# Altium PCB PCB1.PcbDoc
Units mm, origin at the board's own origin, x right, y up, seen from the top; angles counter-clockwise.
Board outline 35.31 x 39.12 mm, 4 copper layers (Top Layer, Layer 1, Layer 2, Bottom Layer), stack 0.603 mm thick; 78 components, 57 nets, 253 pads, 103 vias.
Unrouted connection lines stored in the file: 26.
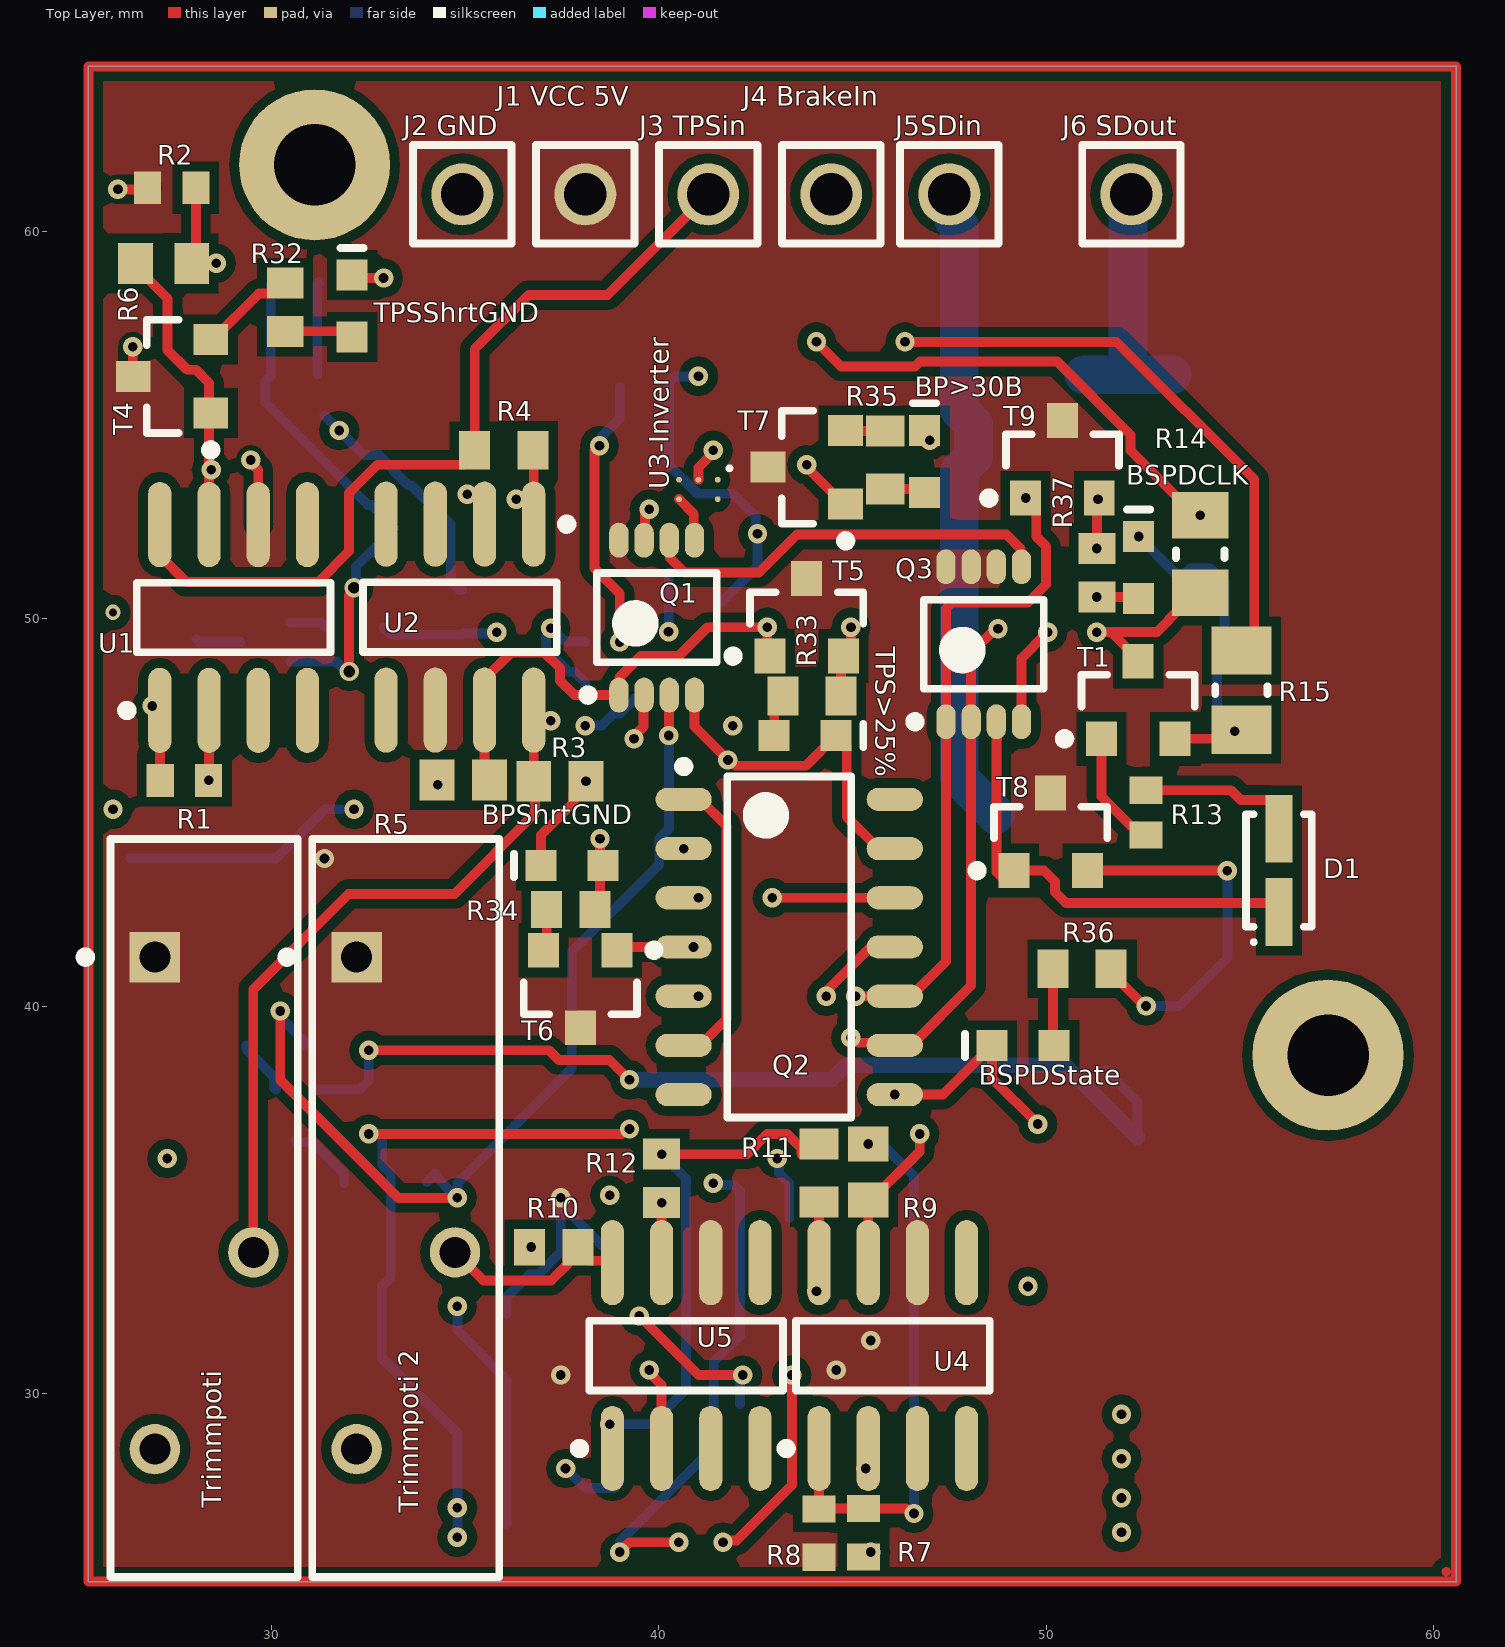
[diagram p0: Top Layer view]
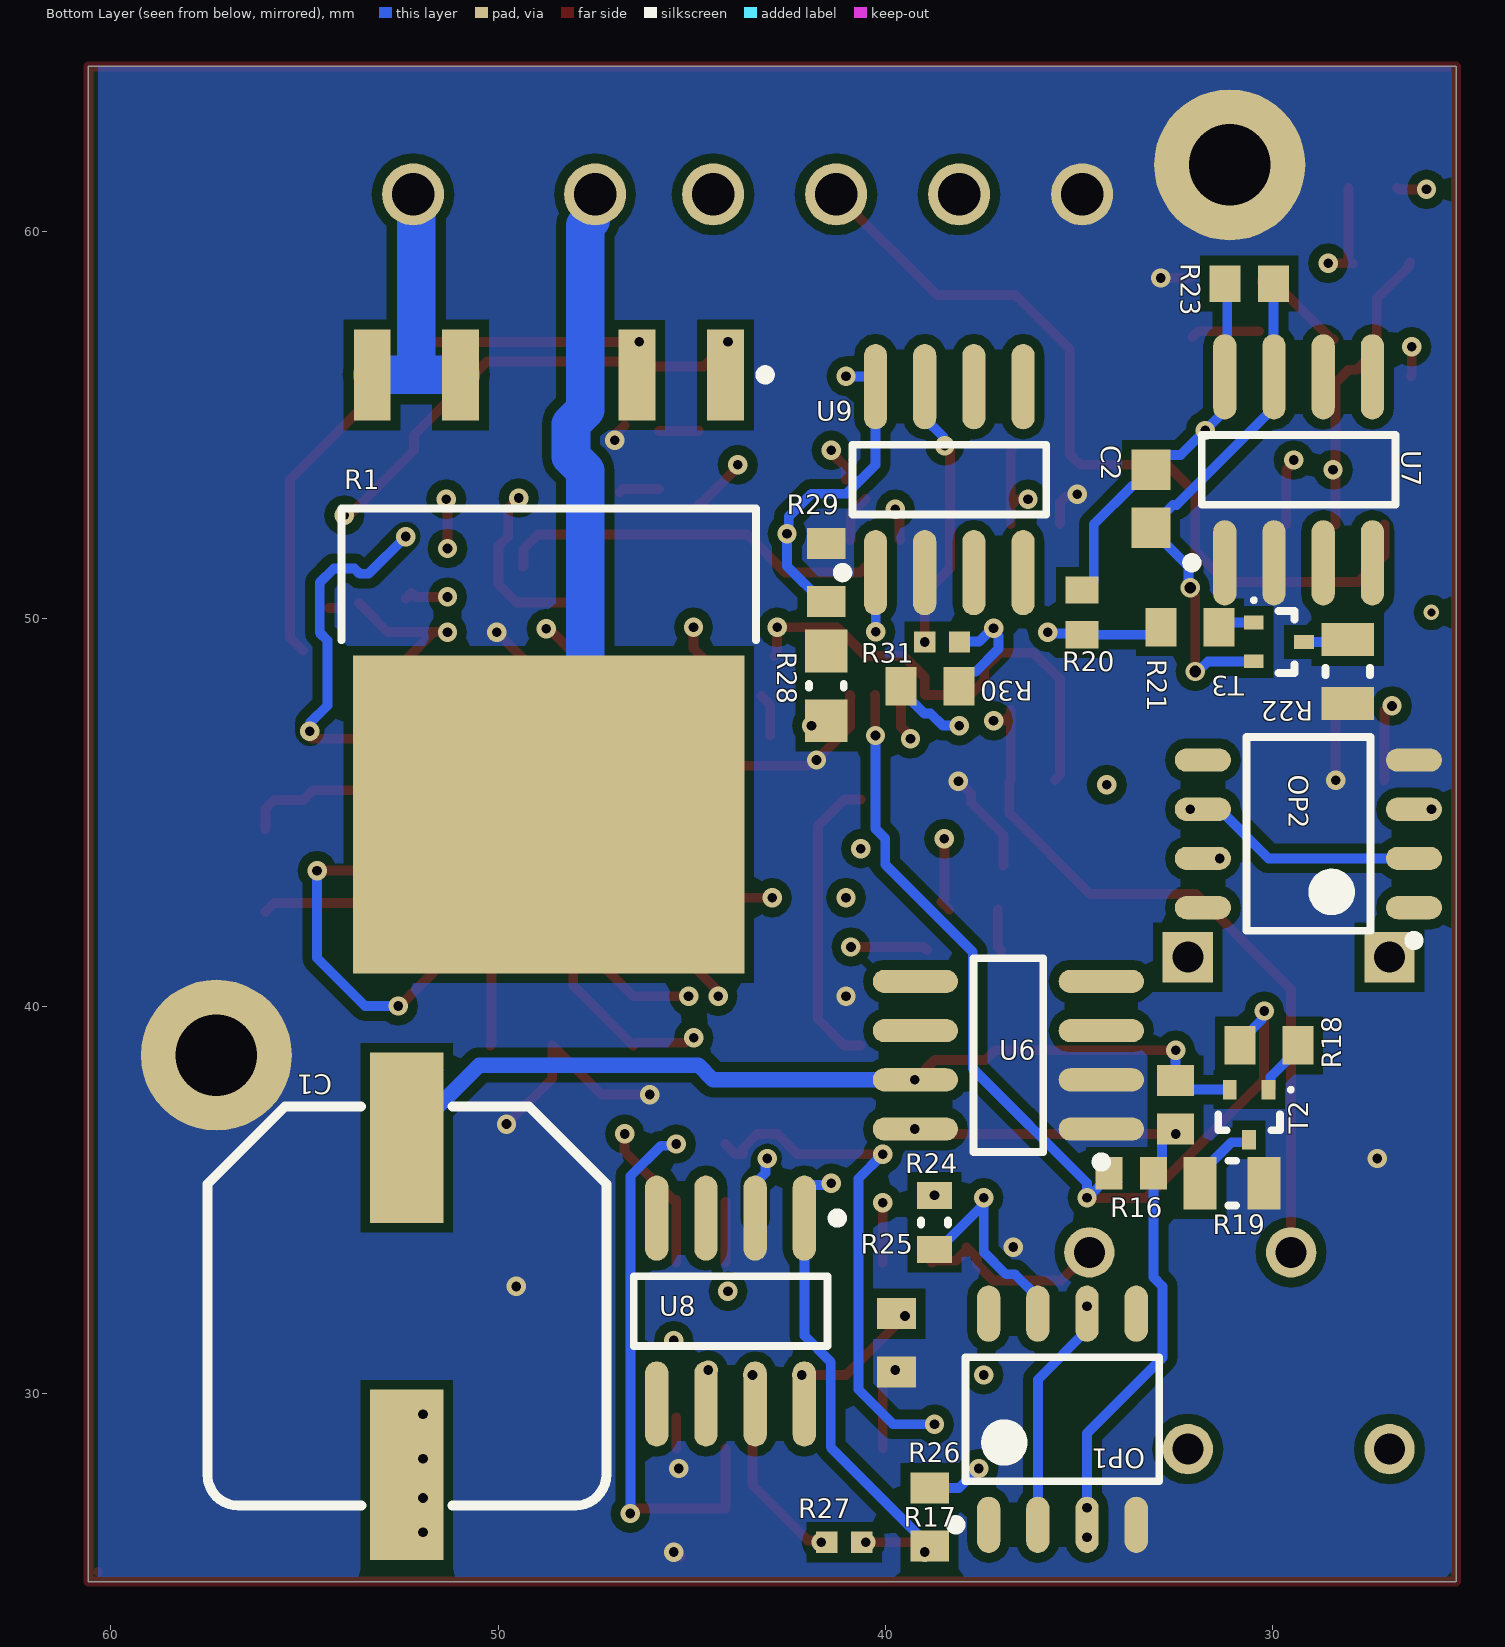
[diagram p1: Bottom Layer view, seen from below]
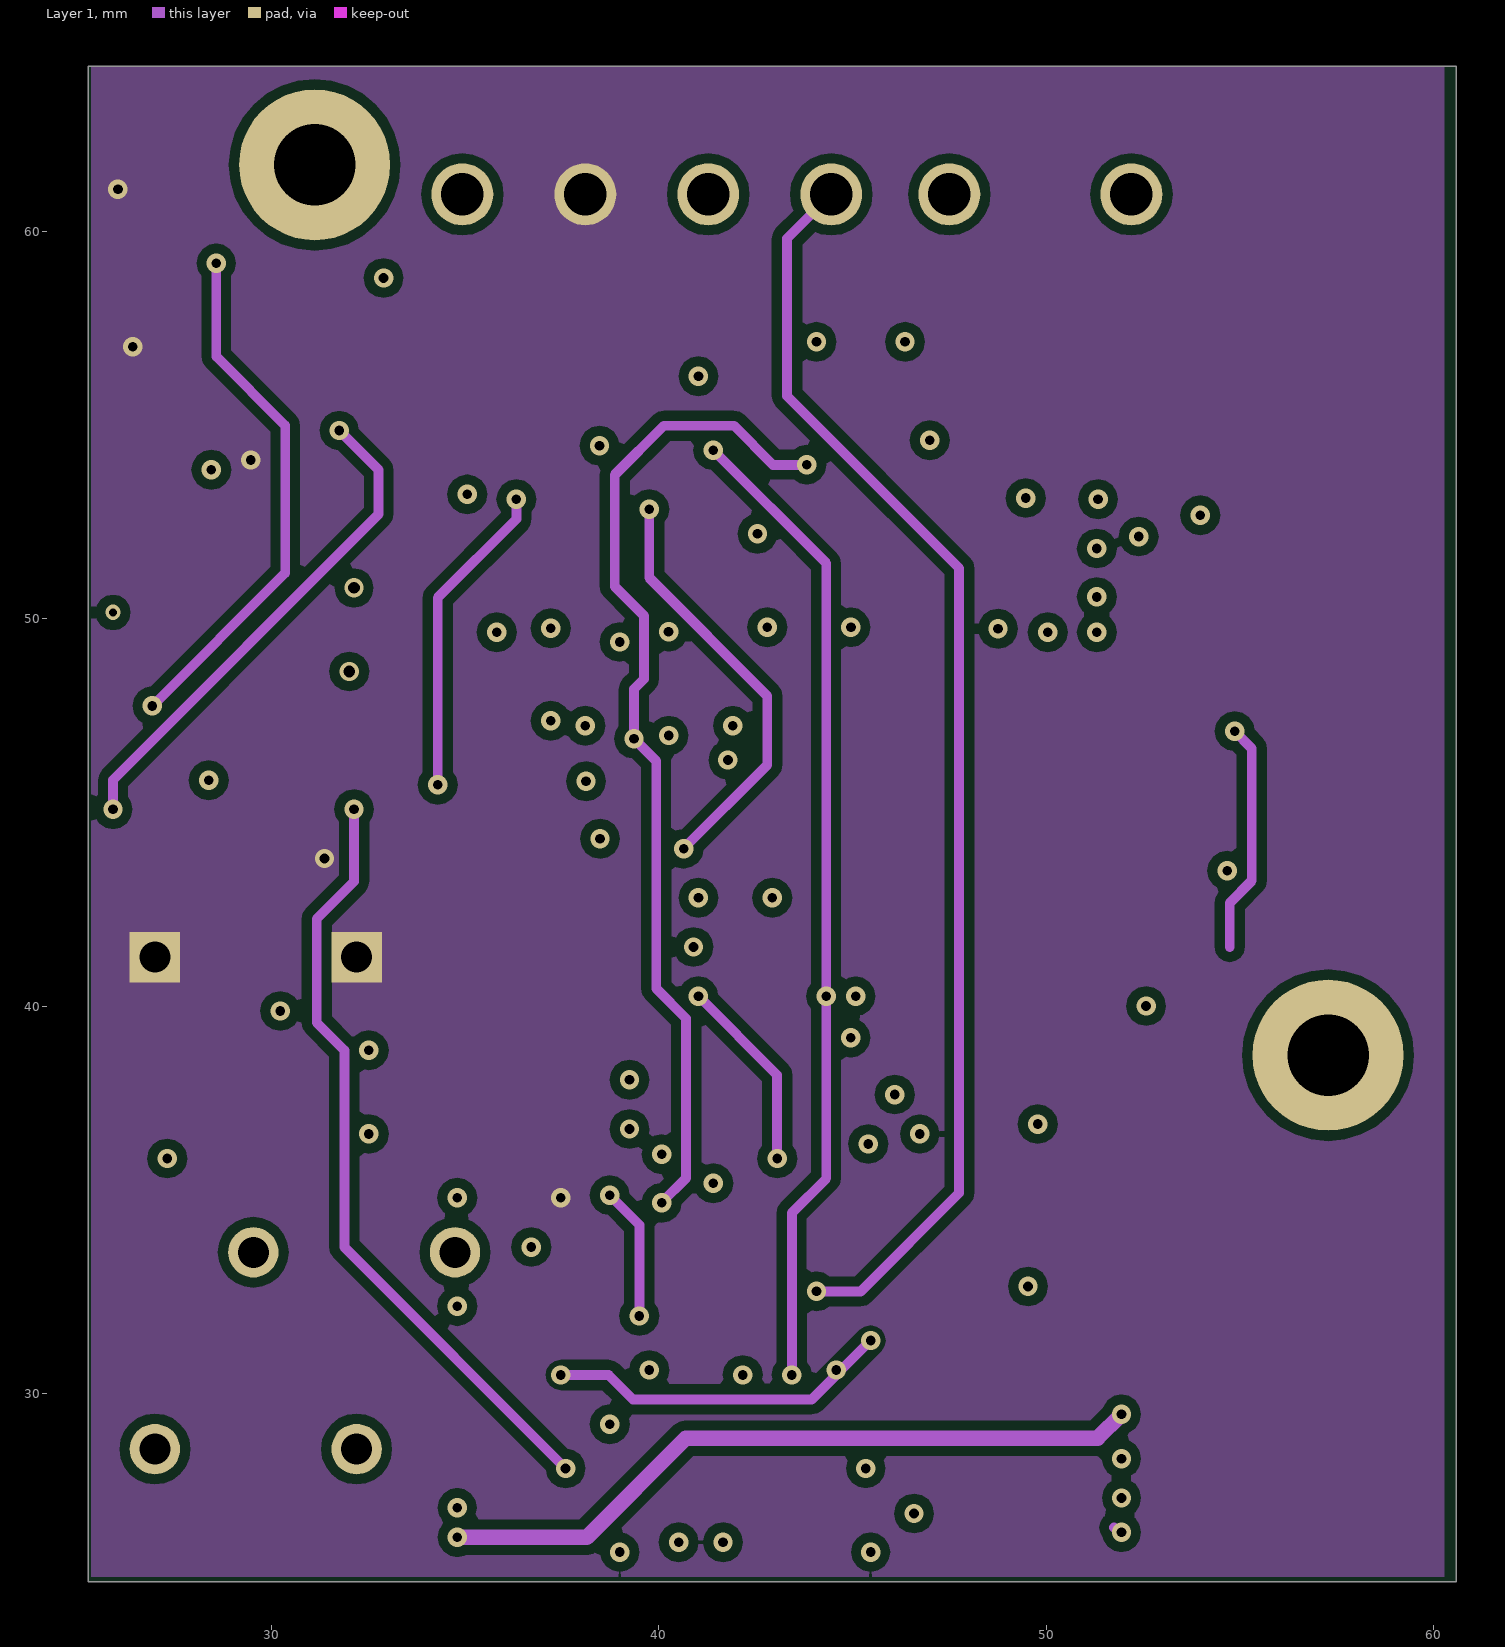
[diagram p2: Layer 1]
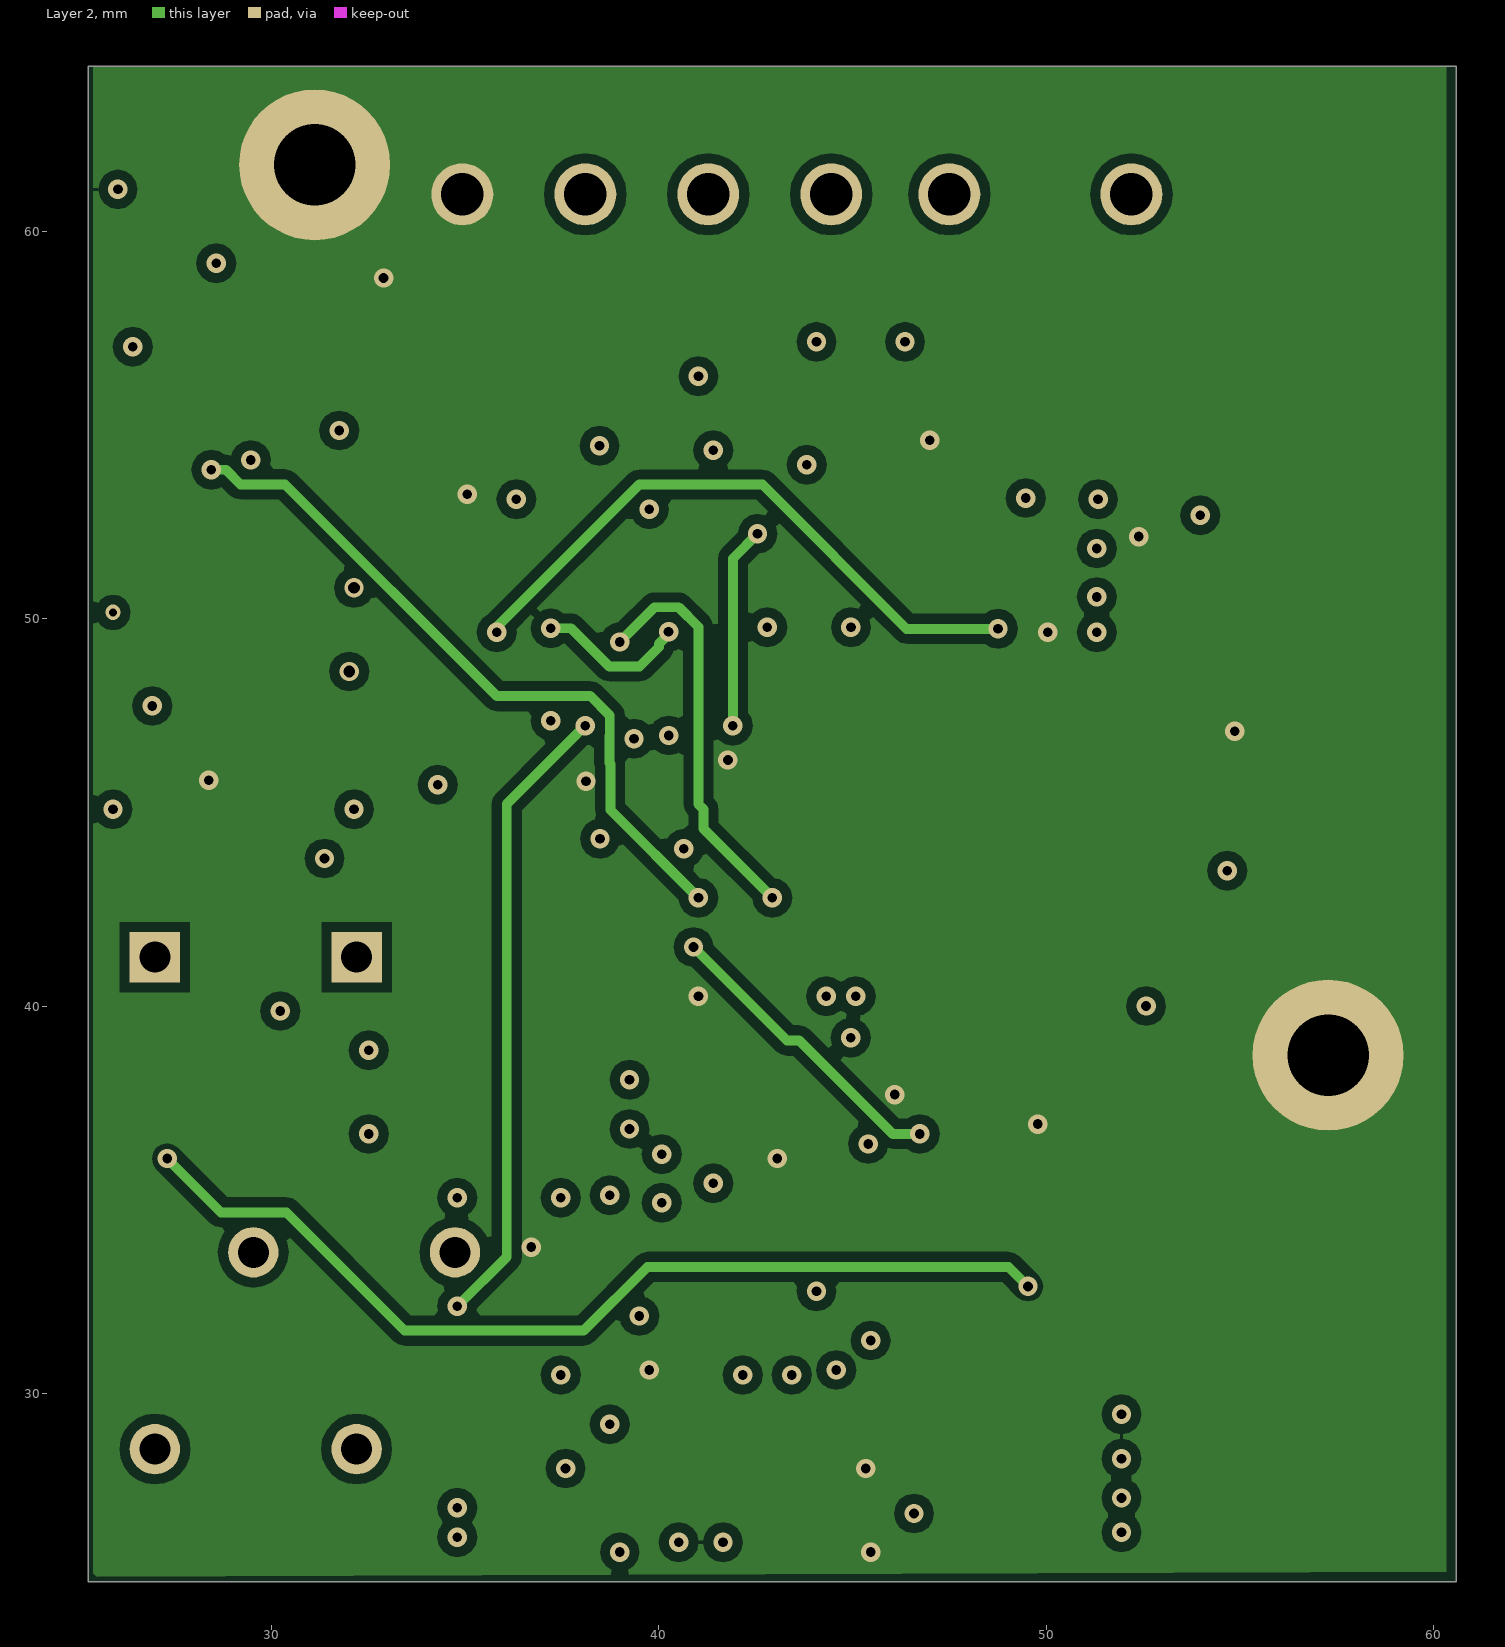
[diagram p3: Layer 2]

## Layer stack, top to bottom
Top Solder: solder mask 0.0102, Solder Resist, Dk 3.5
Top Layer: signal copper 0.0356
Dielectric 2: prepreg 0.0711, PP-006, Dk 4.1
Layer 1: signal copper 0.035
Dielectric 1: dielectric 0.32, FR-4, Dk 4.8
Layer 2: signal copper 0.035
Dielectric 3: prepreg 0.0711, PP-006, Dk 4.1
Bottom Layer: signal copper 0.0356
Bottom Solder: solder mask 0.0102, Solder Resist, Dk 3.5

## Board outline
25.273,25.146 25.273,64.262 60.579,64.262 60.579,25.146

## Design rules (kind name [scope] priority, off if disabled: settings)
Clearance [All] p1: gap=0.254 ignorepadtopadclearanceinfootprint=FALSE except(0: Arc-Hole Track-Hole SMDPad-Hole THPad-Hole Via-Hole Fill-Hole Poly-Hole Region-Hole Text-Hole)
PolygonConnect PolygonConnect_4 [All vs IsNamedPolygon('Top Layer-No Net 2')] p1: connectstyle=Direct reliefconductorwidth=0.254 reliefentries=4 polygonreliefangle="90 Angle" airgapwidth=0.254
PolygonConnect PolygonConnect_3 [All vs IsNamedPolygon('GND_L03_P007')] p2: connectstyle=Direct reliefconductorwidth=0.254 reliefentries=4 polygonreliefangle="90 Angle" airgapwidth=0.254
PolygonConnect PolygonConnect_2 [All vs IsNamedPolygon('5V_L02_P008')] p3: connectstyle=Direct reliefconductorwidth=0.254 reliefentries=4 polygonreliefangle="90 Angle" airgapwidth=0.254
PolygonConnect PolygonConnect_1 [All vs IsNamedPolygon('Top Layer-No Net')] p4: connectstyle=Direct reliefconductorwidth=0.254 reliefentries=4 polygonreliefangle="90 Angle" airgapwidth=0.254
PolygonConnect [All] p5: connectstyle=Relief reliefconductorwidth=0.254 reliefentries=4 polygonreliefangle="90 Angle" airgapwidth=0.254
RoutingVias [All] p1: holewidth=0.711 width=1.27 viastyle="Through Hole" minholewidth=0.711 minwidth=1.27 maxholewidth=0.711 maxwidth=1.27
SolderMaskExpansion [All] p1: expansion=0.102 istentingtop=FALSE
Width [All] p1: maxlimit=0.254 minlimit=0.254 preferedwidth=0.254
30 further rules are at their usual default settings.

## Components (designator, comment, footprint, x,y, rotation, side; value= is the part's Value field where it differs from the comment)
BP>30B "150060GS75000" 0603_A 46.863,54.064 r270 top
BPShrtGND "150060RS75000" 0603_A 37.757,43.636 r0 top
BSPDCLK "150060BS75000" 0603_A 52.385,51.324 r270 top
BSPDState "150060GS75000" 0603_A 49.403,38.989 r0 top
C1 "875075561006" WCAP-PSLC_10x12.4 52.358,32.258 r90 bottom value=150uF
C2 "C0603C335M9PACTU" CAPC1608X90X35NL15T15 33.147,53.098 r270 bottom
D1 "BAT46WH" DIOM2715X18N 56.007,43.504 r90 top
"J1 VCC 5V" "61300111121" 61300111121 38.1,60.96 r90 top
"J2 GND" "61300111121" 61300111121 34.925,60.96 r90 top
"J3 TPSin" "61300111121" 61300111121 41.275,60.96 r90 top
"J4 BrakeIn" "61300111121" 61300111121 44.45,60.96 r90 top
J5SDin "61300111121" 61300111121 47.498,60.96 r90 top
"J6 SDout" "61300111121" 61300111121 52.197,60.96 r90 top
OP1 "AD711" "SOIC8; SOIC127P600X175-8N" 35.433,29.337 r90 bottom
OP2 "AD711" "SOIC8; SOIC127P600X175-8N" 29.083,44.45 r0 bottom
Q1 "Dual 2 input AND gate" "TSSOP8; TSOP65P400X110-8N" 39.944,50.032 r90 top
Q2 "Triple Input OR Gate" "SOIC14; SOIC127P600X175-14N" 43.365,41.529 r0 top
Q3 "74LVC1G74" "TSSOP8; TSOP65P400X110-8N" 48.387,49.344 r90 top
R1 "AUIR3313S" "D2PAK5 ;DPAK228P1524X483-5N" 48.693,49.149 r270 bottom
R1 "ERJ-3EKF1022V" RESC1608X55X30LL15T15 27.752,45.831 r0 top
R2 "ERJ-3EKF4753V" RESC1608X55X30LL15T15 27.422,61.13 r0 top
R3 "CRCW060325K5FKEA" RESC1609X50X30ML10T20 37.444,45.811 r180 top
R4 "RC0603FR-0710KL" RESC1608X55X25ML10T15 35.995,54.35 r0 top
R5 "CRCW0603402KFKEA" RESC1609X50X30ML10T20 34.951,45.841 r0 top
R6 "ERJ-3EKF2433V" RESC1608X55X30ML15T15 27.215,59.175 r180 top
R7 "ERJ-3EKF1022V" RESC1608X55X30LL15T15 45.278,26.41 r270 top
R8 "ERJ-3EKF4753V" RESC1608X55X30LL15T15 44.135,26.4 r90 top
R9 "ERJ-3EKF2433V" RESC1608X55X30ML15T15 45.405,35.718 r270 top
R10 "CRCW060313K0FKEA" RESC1609X50X30NL10T20 37.287,33.776 r0 top
R11 "RC0603FR-0710KL" RESC1608X55X25ML10T15 44.135,35.693 r90 top
R12 "CRCW0603249KFKEA" RESC1609X50X30NL10T20 40.071,35.554 r270 top
R13 "CRCW060330K0FKEA" RESC1609X50X30LL10T20 52.578,45 r270 top
R14 "RC0805FR-071KL" RESC2013X60X35ML10T20 53.975,51.673 r90 top
R15 "CRCW0805510KFKEA" RESC2013X50X30ML20T20 55.041,48.158 r90 top
R16 "CRCW060397K6FKEA" RESC1609X50X30LL10T20 33.655,35.687 r180 bottom
R17 "CRCW0603499KFKEA" RESC1609X50X30NL10T20 32.512,37.455 r90 bottom
R18 "RC0603FR-07100KL" RESC1608X55X25ML10T15 30.099,38.989 r180 bottom
R19 "CRCW0805100RFKEA" RESC2013X50X30LL20T20 31.052,35.433 r180 bottom
R20 "CRCW060397K6FKEA" RESC1609X50X30LL10T20 34.925,50.165 r90 bottom
R21 "RC0603FR-07100KL" RESC1608X55X25ML10T15 32.143,49.784 r180 bottom
R22 "CRCW0805100RFKEA" RESC2013X50X30LL20T20 28.067,48.641 r270 bottom
R23 "CRCW0603499KFKEA" RESC1609X50X30NL10T20 30.607,58.652 r180 bottom
R24 "51K1 1% 0603(1608)" RESC0603(1608)_L 38.735,34.417 r270 bottom value="51100.00 Ohm"
R25 "RC0603FR-07100KL" RESC1608X55X25ML10T15 39.717,31.313 r90 bottom
R26 "RC0603FR-0710KL" RESC1608X55X25ML10T15 38.862,26.809 r270 bottom
R27 "ERJ-2RKF1243X" RESC1005X40X25NL05T05 41.066,26.162 r0 bottom
R28 "118K 1% 0603(1608)" RESC0603(1608)_M 41.529,48.271 r90 bottom value="118000.00 Ohm"
R29 "RC0603FR-07100KL" RESC1608X55X25ML10T15 41.529,51.193 r270 bottom
R30 "RC0603FR-0710KL" RESC1608X55X25ML10T15 38.85,48.26 r180 bottom
R31 "ERJ-2RKF1243X" RESC1005X40X25NL05T05 38.539,49.403 r0 bottom
R32 "CRCW0603130KFKEA" RESC1609X50X30NL10T20 30.353,58.049 r90 top
R33 "RC0603FR-07100RL" RESC1608X55X25ML10T15 43.954,48.006 r180 top
R34 "CRCW0603130KFKEA" RESC1609X50X30NL10T20 37.729,42.493 r180 top
R35 "RC0603FR-07100RL" RESC1608X55X25ML10T15 45.847,54.102 r270 top
R36 "RC0603FR-07100RL" RESC1608X55X25ML10T15 50.927,40.968 r180 top
R37 "CRCW0603130KFKEA" RESC1609X50X30NL10T20 51.308,51.191 r90 top
T1 "BC848BLT1G" ONSC-SOT-23-3-318-08_V 52.374,47.904 r90 top
T2 "MMBT3906TT1G" ONSC-SC-75-3-463-01_V 30.614,37.199 r270 bottom
T3 "MMBT3906TT1G" ONSC-SC-75-3-463-01_V 29.845,49.403 r180 bottom
T4 "BC848BLT1G" ONSC-SOT-23-3-318-08_V 27.432,56.261 r180 top
T5 "BC848BLT1G" ONSC-SOT-23-3-318-08_V 43.815,50.038 r90 top
T6 "BC848BLT1G" ONSC-SOT-23-3-318-08_V 37.973,40.445 r270 top
T7 "BC848BLT1G" ONSC-SOT-23-3-318-08_V 43.821,53.914 r180 top
T8 "BC848BLT1G" ONSC-SOT-23-3-318-08_V 50.114,44.5 r90 top
T9 "BC848BLT1G" ONSC-SOT-23-3-318-08_V 50.419,54.118 r90 top
TPS>25% "150060GS75000" 0603_A 43.777,46.99 r180 top
TPSShrtGND "150060RS75000" 0603_A 32.082,58.077 r270 top
Trimmpoti "3006P-1-104ZLF" BOUR-3006P-3_V 28.26,34.792 r270 top
"Trimmpoti 2" "3006P-1-104ZLF" BOUR-3006P-3_V 33.467,34.792 r270 top
U1 "LT1017IS8#PBF" LT-S8_N 29.022,50.035 r90 top
U2 "LT1017IS8#PBF" LT-S8_N 34.864,50.045 r270 top
U3-Inverter "SN74LVC1G04YZPR" YZP0005ADAD 41.021,53.34 r270 top
U4 "LT1017IS8#PBF" LT-S8_N 46.04,30.982 r90 top
U5 "LT1017IS8#PBF" LT-S8_N 40.706,30.982 r90 top
U6 "LT1017IS8#PBF" LT-S8_N 36.83,38.735 r0 bottom
U7 "LT1017IS8#PBF" LT-S8_N 29.337,53.848 r90 bottom
U8 "LT1017IS8#PBF" LT-S8_N 44.002,32.131 r270 bottom
U9 "LT1017IS8#PBF" LT-S8_N 38.354,53.594 r90 bottom

## Footprints (in the part's own frame and the unit in brackets; to place one, negate y for a bottom-side part, rotate by r counter-clockwise, add the part's x,y. Pads: shape width x height; smd on the part's side, far side on the other; paste and mask are expansions set on the pad)
0603_A [mm] "Chip LED, 2-Leads, Body 1.6x0.8mm, IPC Medium Density"
  rect 0.8x0.8 smd: 1(-0.8,0) 2(0.8,0)
  silkscreen extent -1.5,-0.3 -1.5,0.3, body extent -0.8,-0.4 0.8,0.4, height 0.7
61300111121 [mm] "1pins, 1 row, straight, gold plating"
  round 1.6 hole 1.1: 1(0,0)
  silkscreen extent -1.27,-1.27 1.27,1.27, body extent -1.27,-1.27 1.27,1.27, height 8.57
BOUR-3006P-3_V [mm] "THD, 3-Leads, Body 19.05x4.83mm, Height 6.6mm"
  rect 1.3x1.3 hole 0.8: 1(-6.475,-1.27)
  round 1.3 hole 0.8: 2(1.145,1.27) 3(6.225,-1.27)
  silkscreen extent -9.53,-3.19 9.53,2.41, body extent -9.53,-2.41 11.05,2.41, height 6.6
CAPC1608X90X35NL15T15 [mm] "Chip Capacitor, 2-Leads, Body 1.60x0.81mm, IPC Medium Density"
  rect 1.05x1 smd: 1(-0.75,0) 2(0.75,0)
  body extent -0.88,-0.48 0.87,0.48, height 0.9
"D2PAK5 ;DPAK228P1524X483-5N" [mm] "D2-PAK, 5-Pads, Body 7,93x8,70mm (max), IPC Medium Density"
  rect 2.35x0.95 smd: 1(-7.15,4.56) 2(-7.15,2.28) 4(-7.15,-2.28) 5(-7.15,-4.56)
  rect 8.2x10.1 smd: 3(4.2,0)
  silkscreen extent -7.27,-5.35 -0.3,5.71, body extent -7.51,-5.33 7.74,5.32, height 4.83
DIOM2715X18N [mm] "Molded Diode, 2-Leads, Body 2,70x1,55mm, IPC Medium Density"
  rect 1.75x0.7 smd: 1(-1.075,0) 2(1.075,0)
  silkscreen extent -1.9,-0.85 1.45,0.85, body extent -1.65,-0.85 1.65,0.85, height 1.8
LT-S8_N [mm] "SOP, 8-Leads, Body 4.9x3.9mm, Pitch 1.27mm, IPC Medium Density"
  oval 2.2x0.6 smd: 1(-2.4,1.905) 2(-2.4,0.635) 3(-2.4,-0.635) 4(-2.4,-1.905) 5(2.4,-1.905) 6(2.4,-0.635) 7(2.4,0.635) 8(2.4,1.905)
  silkscreen extent -2.52,-2.5 0.9,2.88, body extent -2,-2.5 2,2.5, height 1.76
ONSC-SC-75-3-463-01_V [mil] "SOT23, 3-Leads, Body 1.6x0.8mm, Pitch 0.5mm"
  rect 20x14.02 smd: 1(-25.49,19.68) 2(-25.49,-19.69) 3(25.49,0)
  silkscreen extent -27,-31 16,44, body extent -16,-31 16,31, height 35
ONSC-SOT-23-3-318-08_V [mm] "SOT23, 3-Leads, Body 2.92x1.3mm, Pitch 0.95mm"
  rect 0.9x0.8 smd: 1(-1,0.95) 2(-1,-0.95) 3(1,0)
  silkscreen extent -1.12,-1.46 0.65,2.02, body extent -0.65,-1.46 0.65,1.46, height 1.11
RESC0603(1608)_L [mm] "Chip Resistor, Body 1.6x0.8mm, IPC High Density"
  rect 0.7x0.9 smd: 1(-0.7,0) 2(0.7,0)
  silkscreen extent -0.05,-0.35 0.05,0.35, body extent -0.85,-0.47 0.85,0.47, height 0.6
RESC0603(1608)_M [mm] "Chip Resistor, Body 1.6x0.8mm, IPC Low Density"
  rect 1.1x1.1 smd: 1(-0.9,0) 2(0.9,0)
  silkscreen extent -0.05,-0.45 0.05,0.45, body extent -0.85,-0.47 0.85,0.47, height 0.6
RESC1005X40X25NL05T05 [mm] "Chip Resistor, 2-Leads, Body 1.00x0.50mm, IPC Medium Density"
  rect 0.55x0.55 smd: 1(-0.45,0) 2(0.45,0)
  body extent -0.53,-0.27 0.53,0.28, height 0.4
RESC1608X55X25ML10T15 [mm] "Chip Resistor, 2-Leads, Body 1.60x0.80mm, IPC Low Density"
  rect 0.8x1 smd: 1(-0.75,0) 2(0.75,0)
  body extent -0.85,-0.45 0.85,0.45, height 0.55
RESC1608X55X30LL15T15 [mm] "Chip Resistor, 2-Leads, Body 1.60x0.80mm, IPC High Density"
  rect 0.7x0.85 smd: 1(-0.625,0) 2(0.625,0)
  body extent -0.87,-0.48 0.87,0.48, height 0.55
RESC1608X55X30ML15T15 [mm] "Chip Resistor, 2-Leads, Body 1.60x0.80mm, IPC Low Density"
  rect 0.9x1.05 smd: 1(-0.725,0) 2(0.725,0)
  body extent -0.87,-0.48 0.87,0.48, height 0.55
RESC1609X50X30LL10T20 [mm] "Chip Resistor, 2-Leads, Body 1.55x0.85mm, IPC High Density"
  rect 0.7x0.85 smd: 1(-0.575,0) 2(0.575,0)
  body extent -0.82,-0.48 0.82,0.48, height 0.5
RESC1609X50X30ML10T20 [mm] "Chip Resistor, 2-Leads, Body 1.55x0.85mm, IPC Low Density"
  rect 0.9x1.05 smd: 1(-0.675,0) 2(0.675,0)
  body extent -0.82,-0.48 0.82,0.48, height 0.5
RESC1609X50X30NL10T20 [mm] "Chip Resistor, 2-Leads, Body 1.55x0.85mm, IPC Medium Density"
  rect 0.8x0.95 smd: 1(-0.625,0) 2(0.625,0)
  body extent -0.82,-0.48 0.82,0.48, height 0.5
RESC2013X50X30LL20T20 [mm] "Chip Resistor, 2-Leads, Body 2.00x1.25mm, IPC High Density"
  rect 0.85x1.35 smd: 1(-0.825,0) 2(0.825,0)
  silkscreen extent -0.1,-0.58 0.1,0.58, body extent -1.1,-0.72 1.1,0.72, height 0.5
RESC2013X50X30ML20T20 [mm] "Chip Resistor, 2-Leads, Body 2.00x1.25mm, IPC Low Density"
  rect 1.25x1.55 smd: 1(-1.025,0) 2(1.025,0)
  silkscreen extent -0.1,-0.67 0.1,0.67, body extent -1.1,-0.72 1.1,0.72, height 0.5
RESC2013X60X35ML10T20 [mm] "Chip Resistor, 2-Leads, Body 2.1x1.35mm, IPC Low Density"
  rect 1.2x1.45 smd: 1(-1,0) 2(1,0)
  silkscreen extent -0.1,-0.63 0.1,0.63, body extent -1.05,-0.68 1.05,0.67, height 0.6
"SOIC8; SOIC127P600X175-8N" [mm] "SOIC, 8-Leads, Body 4,90x3,90mm, Pitch 1,27mm, IPC Medium Density"
  oval 1.45x0.6 smd: 1(-2.725,1.905) 2(-2.725,0.635) 3(-2.725,-0.635) 4(-2.725,-1.905) 5(2.725,-1.905) 6(2.725,-0.635) 7(2.725,0.635) 8(2.725,1.905)
  silkscreen extent -2.85,-2.5 1.6,2.88, body extent -2,-2.5 2,2.5, height 1.75
"SOIC14; SOIC127P600X175-14N" [mm] "SOIC, 14-Leads, Body 8,65x3,90mm, Pitch 1,27mm, IPC Medium Density"
  oval 1.45x0.6 smd: 1(-2.725,3.81) 2(-2.725,2.54) 3(-2.725,1.27) 4(-2.725,0) 5(-2.725,-1.27) 6(-2.725,-2.54) 7(-2.725,-3.81) 8(2.725,-3.81) 9(2.725,-2.54) 10(2.725,-1.27) 11(2.725,0) 12(2.725,1.27) 13(2.725,2.54) 14(2.725,3.81)
  silkscreen extent -2.85,-4.4 1.6,4.78, body extent -3,-4.4 3,4.4, height 1.75
"TSSOP8; TSOP65P400X110-8N" [mm] "TSOP, 8-Leads, Body 3,00x3,00mm, Pitch 0,65mm, IPC Medium Density"
  oval 0.9x0.5 smd: 1(-2,0.975) 2(-2,0.325) 3(-2,-0.325) 4(-2,-0.975) 5(2,-0.975) 6(2,-0.325) 7(2,0.325) 8(2,0.975)
  silkscreen extent -2.12,-1.55 1.15,1.9, body extent -1.55,-1.55 1.55,1.55, height 1.1
WCAP-PSLC_10x12.4 [mm] "Aluminium Polymer V-Chip SMT Capacitors, §¶10x12.4mm"
  rect 4.4x1.9 smd: 1(4.35,0) 2(-4.35,0)
  silkscreen extent -5.15,-5.15 5.15,5.15, body extent -5.5,-5.15 5.5,5.15, height 12.4
YZP0005ADAD [mm] "BGA, 5-Balls, Body 1.39x0.89mm, Pitch 0.5mm"
  round 0.15 smd: A1(-0.25,0.5) A2(0.25,0.5) B1(-0.25,0) C1(-0.25,-0.5) C2(0.25,-0.5)
  silkscreen extent -0.6,0.75 -0.5,0.85, body extent -0.45,-0.69 0.45,0.69, height 0.5

## Part data
BP>30B BSPDState TPS>25%: library part CMP-1426-00002-1, "SMD mono-color Chip LED, WL-SMCW, Green", Color=Green, Manufacturer="Wuerth Elektronik", ComponentLink1Description="Manufacturer URL", ComponentLink1URL=http://www.we-online.com, ComponentLink2Description=Datasheet, ComponentLink2URL=http://katalog.we-online.com/led/datasheet/150060GS75000.pdf, PackageReference=0603_A, PartNumber=150060GS75000
BPShrtGND TPSShrtGND: library part CMP-1426-00001-1, "SMD mono-color Chip LED, WL-SMCW, Red", Color=Red, Manufacturer="Wuerth Elektronik", ComponentLink1Description="Manufacturer URL", ComponentLink1URL=http://www.we-online.com, ComponentLink2Description=Datasheet, ComponentLink2URL=http://katalog.we-online.com/led/datasheet/150060RS75000.pdf, PackageReference=0603_A, PartNumber=150060RS75000
BSPDCLK: library part CMP-1426-00003-1, "SMD mono-color Chip LED, WL-SMCW, Blue", Color=Blue, Manufacturer="Wuerth Elektronik", ComponentLink1Description="Manufacturer URL", ComponentLink1URL=http://www.we-online.com, ComponentLink2Description=Datasheet, ComponentLink2URL=http://katalog.we-online.com/led/datasheet/150060BS75000.pdf, PackageReference=0603_A, PartNumber=150060BS75000
C1: "WCAP-PSLC Aluminum Polymer Capacitors, size Ф10x12.4mm, 25V DC, 150uF", Operating Temperature="-55 °C up to +105 °C", Rated Voltage="25V DC", ComponentLink1Description=Manufacturer, ComponentLink1URL=http://www.we-online.de, ComponentLink2Description=Datasheet, ComponentLink2URL=http://katalog.we-online.de/pbs/datasheet/875075561006.pdf, Life Cycle=2000h, Part Number=875075561006, Published Date="June 2017", Publisher="Wurth Elektronik", Size=Ф10x12.4mm
C2: library part CMP-2006-02261-1, Manufacturer=Kemet, Part Number=C0603C335M9PACTU
"J1 VCC 5V" "J2 GND" "J3 TPSin" "J4 BrakeIn" J5SDin "J6 SDout": "WR-PHD 2.54 mm THT Pin Header, 1p", Rated Current="3 A", Withstanding Voltage="500 VAC", Working Voltage="250 VAC", ComponentLink1Description=Manufacturer, ComponentLink1URL=http://www.we-online.de, ComponentLink2Description=Datasheet, ComponentLink2URL=http://katalog.we-online.de/em/datasheet/6130xx11121.pdf, Part Number=61300111121, Pin Number=1, Pitch="2.54 mm", Published Date="Aug 2017", Publisher="Wurth Elektronik"
OP1 OP2: Supplier Part Number 1=584-AD711JRZ, Supplier 1=Mouser
Q1: library part 74LVC2G08-Q100, Supplier Part Number 1=771-74LVC2G08DP-G, Supplier 1=Mouser
Q2: library part 74HCT4075D,653, Supplier Part Number 1=771-74HCT4075D-T, Supplier 1=Mouser
Q3: Supplier Part Number 1=771-LVC1GDP125, Supplier 1=Mouser
R1 R7: library part CMP-2000-00185-1, Manufacturer=Panasonic, Part Number=ERJ-3EKF1022V
R2 R8: library part CMP-2000-00528-1, Manufacturer=Panasonic, Part Number=ERJ-3EKF4753V
R3: library part CMP-2000-03129-1, Manufacturer="Vishay Dale", Part Number=CRCW060325K5FKEA
R4 R11 R26 R30: library part CMP-2100-03664-1, "Chip Resistor, 10 KOhm, +/- 1%, 01 W, -55 to 155 degC, 0603 (1608 Metric), RoHS, Tape and Reel", Case/Package=0603, Case Code (Metric)=1608, Manufacturer=Yageo, Max Operating Temperature=155degC, Min Operating Temperature=-55degC, Package Description="2-Pin Surface Mount Device, Body 1.6 x 0.8 mm", Power Rating=100mW, Resistance=10KOhm, Temperature Coefficient=100ppm/degreesC, Tolerance=1%, Voltage Rating=75V, Voltage Rating (DC)=50V, Case Code (Imperial)=0603, Composition=ThickFilm, Datasheet URL=http://www.yageo.com/NewPortal/yageodocoutput?fileName=/pdf/R-Chip/PYu-RC_Group_51_RoHS_L_5.pdf, Datasheet Version="Rev. 5, 10/2016", Depth=0.8mm, Height=0.45mm, Lead Free=LeadFree, Lead Pitch=0.3mm, Length=1.6mm, Manufacturer URL=http://www.yageo.com/, Military Standard=Not, Number of Pins=2, Package Reference=0603, Packaging=TapeandReel, REACH SVHC=NoSVHC, RoHSCompliant=true, Termination=SMD/SMT, Weight=7.1E-05oz, Width=0.8mm
R5: library part CMP-2000-03334-1, Manufacturer="Vishay Dale", Part Number=CRCW0603402KFKEA
R6 R9: library part CMP-2000-00367-1, Manufacturer=Panasonic, Part Number=ERJ-3EKF2433V
R10: library part CMP-2000-03895-1, Manufacturer="Vishay Dale", Part Number=CRCW060313K0FKEA
R12: library part CMP-2000-03115-1, Manufacturer="Vishay Dale", Part Number=CRCW0603249KFKEA
R13: library part CMP-2000-03223-1, Manufacturer="Vishay Dale", Part Number=CRCW060330K0FKEA
R14: library part CMP-2100-03671-1, "Chip Resistor, 1 KOhm, +/- 1%, 125 mW, -55 to 155 degC, 0805 (2012 Metric), RoHS, Tape and Reel", Case/Package=0805, Case Code (Metric)=2012, Manufacturer=Yageo, Max Operating Temperature=155degC, Max Power Dissipation=125mW, Min Operating Temperature=-55degC, Package Description="2-Pin Surface Mounted Device, Body 2 x 1.25 mm", Package Quantity=1, Resistance=1KOhm, Temperature Coefficient=100ppm/degreesC, Tolerance=1%, Voltage Rating=150V, Case Code (Imperial)=0805, Composition=ThickFilm, Datasheet URL=http://www.yageo.com/NewPortal/yageodocoutput?fileName=/pdf/R-Chip/PYu-RC_Group_51_RoHS_L_5.pdf, Datasheet Version="Rev. 5, 10/2016", Depth=1.25mm, Height=0.024inch, Lead Free=LeadFree, Length=0.079inch, Manufacturer URL=http://www.yageo.com/, Military Standard=Not, Number of Pins=2, Number of Terminations=2, Package Reference=0805, Packaging=TapeandReel, Power Rating=125mW, REACH SVHC=Unknown, RoHSCompliant=true, Termination=SMD/SMT, Voltage Rating (DC)=150V, Width=0.049inch
R15: library part CMP-2001-03987-1, Manufacturer="Vishay Dale", Part Number=CRCW0805510KFKEA
R16 R20: library part CMP-2000-03650-1, Manufacturer="Vishay Dale", Part Number=CRCW060397K6FKEA
R17 R23: library part CMP-2000-03389-1, Manufacturer="Vishay Dale", Part Number=CRCW0603499KFKEA
R18 R21 R25 R29: library part CMP-2100-03662-1, "Chip Resistor, 100 KOhm, +/- 1%, 0.1 W, -55 to 155 degC, 0603 (1608 Metric), RoHS, Tape and Reel", Case/Package=0603, Case Code (Metric)=1608, Manufacturer=Yageo, Max Operating Temperature=155degC, Min Operating Temperature=-55degC, Package Description="2-Pin Surface Mount Device, Body 1.6 x 0.8 mm", Power Rating=100mW, Resistance=100KOhm, Temperature Coefficient=100ppm/degreesC, Tolerance=1%, Voltage Rating=50V, Case Code (Imperial)=0603, Composition=ThickFilm, Datasheet URL=http://www.yageo.com/NewPortal/yageodocoutput?fileName=/pdf/R-Chip/PYu-RC_Group_51_RoHS_L_5.pdf, Datasheet Version="Rev. 5, 10/2016", Depth=0.8mm, Height=0.45mm, Lead Free=LeadFree, Length=1.6mm, Manufacturer URL=http://www.yageo.com/, Military Standard=Not, Number of Pins=2, Package Reference=0603, Packaging=TapeandReel, REACH SVHC=NoSVHC, RoHSCompliant=true, Termination=SMD/SMT, Voltage Rating (DC)=50V, Width=0.8mm
R19 R22: library part CMP-2001-04901-1, Manufacturer="Vishay Dale", Part Number=CRCW0805100RFKEA
R24: library part CMP-1012-00704-1, "51K1 0.1W 1% 0603 (1608 Metric)  SMD", Case-EIA=0603, Case-Metric=1608, Power="0.1 W", Tolerance="1 %", Technology=SMT
R27 R31: library part CMP-2002-00654-1, Manufacturer=Panasonic, Part Number=ERJ-2RKF1243X
R28: library part CMP-1012-00743-1, "118K 0.1W 1% 0603 (1608 Metric)  SMD", Case-EIA=0603, Case-Metric=1608, Power="0.1 W", Tolerance="1 %", Technology=SMT
R32 R34 R37: library part CMP-2000-03887-1, Manufacturer="Vishay Dale", Part Number=CRCW0603130KFKEA
R33 R35 R36: library part CMP-2100-03663-1, "Chip Resistor, 100 Ohm, +/- 1%, 0.1 W, -55 to 155 degC, 0603 (1608 Metric), RoHS, Tape and Reel", Case/Package=0603, Case Code (Metric)=1608, Manufacturer=Yageo, Max Operating Temperature=155degC, Min Operating Temperature=-55degC, Package Description="2-Pin Surface Mount Device, Body 1.6 x 0.8 mm", Power Rating=100mW, Resistance=100Ohm, Temperature Coefficient=100ppm/degreesC, Tolerance=1%, Voltage Rating=50V, Case Code (Imperial)=0603, Composition=ThickFilm, Datasheet URL=http://www.yageo.com/NewPortal/yageodocoutput?fileName=/pdf/R-Chip/PYu-RC_Group_51_RoHS_L_5.pdf, Datasheet Version="Rev. 5, 10/2016", Depth=0.8mm, Height=0.45mm, Lead Free=LeadFree, Length=1.6mm, Manufacturer URL=http://www.yageo.com/, Military Standard=Not, Number of Pins=2, Package Reference=0603, Packaging=TapeandReel, REACH SVHC=Unknown, RoHSCompliant=true, Termination=SMD/SMT, Voltage Rating (DC)=50V, Width=0.8mm
T1 T4 T5 T6 T7 T8 T9: library part CMP-1048-00679-1, "General Purpose Transistor, NPN Silicon, 3-Pin SOT-23, Pb-Free, Tape and Reel", Manufacturer="On Semiconductor", ComponentLink1Description="Manufacturer URL", ComponentLink1URL=http://www.onsemi.com/, ComponentLink2Description=Datasheet, ComponentLink2URL=http://www.onsemi.cn/pub_link/Collateral/BC846ALT1-D.PDF, ComponentLink3Description="Package Specification", ComponentLink3URL=http://www.onsemi.cn/pub_link/Collateral/318-08.PDF, DatasheetVersion="Rev. 11", fT Min (MHz)=100, IC Continuous (A)=0.1, Mounting Technology="Surface Mount", PackageDescription="3-Pin Small Outline Transistor, Body 2.92 x 1.3 mm, Pitch 0.95 mm", PackageReference=SOT-23-3-318-08, PackageVersion="Rev. AP, 11/2009", Packing="Tape and Reel", PartNumber=BC848BLT1G, Polarity=NPN, RoHS=TRUE
T2 T3: library part CMP-1048-00413-1, "General Purpose Transistor, PNP Silicon, 3-Pin SC-75, Pb-Free, Tape and Reel", Manufacturer="On Semiconductor", ComponentLink1Description="Manufacturer URL", ComponentLink1URL=http://www.onsemi.com/, ComponentLink2Description=Datasheet, ComponentLink2URL=http://www.onsemi.cn/pub_link/Collateral/MMBT3906TT1-D.PDF, ComponentLink3Description="Package Specification", ComponentLink3URL=http://www.onsemi.com/pub_link/Collateral/463-01.PDF, DatasheetVersion="Rev. 1", fT Min (MHz)=250, IC Continuous (A)=-0.2, Mounting Technology="Surface Mount", PackageDescription="3-Pin Small Outline Transistor, Body 1.6 x 0.8 mm, Pitch 0.5 mm", PackageReference=SC-75-3-463-01, PackageVersion="Rev. F, 07/2005", Packing="Tape and Reel", PartNumber=MMBT3906TT1G, Polarity=PNP, RoHS=TRUE
Trimmpoti "Trimmpoti 2": library part CMP-0975-00010-1, "Trimming Potentiometer, 100K Ohm +/- 10%, -55 to 125 degC, 3-Pin 19.05 x 4.83 x 6.6 mm THD, RoHS", Manufacturer=Bourns, Resistance (kOhm)=100, Resistance Tolerance="+/- 10%", Temperature Range="-55 to 125 degC", ComponentLink1Description="Manufacturer URL", ComponentLink1URL=http://www.bourns.com/, ComponentLink2Description=Datasheet, ComponentLink2URL=http://www.bourns.com/data/global/pdfs/3006.pdf, ComponentLink3Description="Package Specification", ComponentLink3URL=http://www.bourns.com/data/global/pdfs/3006.pdf, DatasheetVersion=Apr-14, Mounting Technology="Through Hole", Number of Turns=15, PackageDescription="3-Pin THD, Body 19.05 x 4.83 mm, Height 6.6 mm", PackageReference=3006P-3, PackageVersion=Apr-14, PartNumber=3006P-1-104ZLF, RoHS=TRUE, Rotational Life="200 Cycles"
U1 U2 U4 U5 U6 U7 U8 U9: library part CMP-0360-00547-2, "Micropower Comparator, 2 Channels, 1.2 to 40 V, -40 to +85 degC, 8-pin SOP (S8)", Generic Part Number=LT1017, Manufacturer="Linear Technology", Supply Current (uA) Guaranteed=60, Supply Current (uA) Typical=30, Supply Voltage Range="1.2 to 40 V", Channels (#)=2, ComponentLink1Description="Manufacturer URL", ComponentLink1URL=http://www.linear.com/, ComponentLink2Description=Datasheet, ComponentLink2URL=http://cds.linear.com/docs/en/datasheet/10178ff.pdf, ComponentLink3Description="Package Specification", ComponentLink3URL=http://cds.linear.com/docs/en/packaging/05081610_G_SO8.pdf, DatasheetVersion="Rev F", Features=Comparator, Mounting Technology="Surface Mount", PackageDescription="8-Pin Plastic Small Outline (Narrow .150 Inch), Body 4.9 x 3.9 mm, Pitch 1.27 mm", PackageReference=S8, PartNumber=LT1017IS8#PBF, Prop Delay (us)=22, RoHS=Y, Vos (mV) Guaranteed=1, Vos (mV) Typical=0.4, Vs Max (V)=40, Vs Min (V)=1.2
U3-Inverter: library part CMP-0859-01021-3, "Single Inverter, YZP0005ADAD, LARGE T&R", F @ Nom Voltage(Max)(Mhz)=150, Generic Part Number=SN74LVC1G04, ICC @ Nom Voltage(Max)(mA)=0.01, Manufacturer="Texas Instruments", Operating Temperature Range(C)="-40 to 125,-40 to 85", Rating=Catalog, tpd @ Nom Voltage(Max)(ns)=7.5,5.2,4.2,3.7, Voltage(Nom)(V)=1.8,2.5,3.3,5, 3-State Output=No, Bits(#)=1, DatasheetVersion=SCES214AD, Input Type=CMOS/TTL, Logic=Inverting, Output Drive (IOL/IOH)(Max)(mA)=32/-32, Output Type=CMOS, PackageReference=YZP0005ADAD, Schmitt Trigger=No, Sub-Family="Inverting Buffer/Driver", Technology Family=LVC, VCC(Max)(V)=5.5, VCC(Min)(V)=1.65

## Free pads (board coordinates)
  round 3.9 hole 2.1: 3(31.115,61.722) 4(57.277,38.735)

## Via types
v1: diameter 0.5, hole 0.25, Top Layer to Bottom Layer, 100 vias
v2: diameter 0.5, hole 0.3, Top Layer to Bottom Layer, 2 vias
v3: diameter 0.4, hole 0.2, Top Layer to Bottom Layer, 1 vias

## Nets (pads, with @x,y where several pads share a name; then routed paths per layer and width w, separated by ;. In a path a pad name is that pad's centre, name@x,y a point inside that pad or via, vN(x,y) a via of type N, cw(c..) or ccw(c..) an arc to the next point about the centre after c; other vN are vias at no path point)
5V: "J1 VCC 5V.1" "Trimmpoti 2.1" OP1.7 OP2.7 Q1.8 Q3.6 Q3.7 Q3.8 R2.1 R8.1 R24.2 R28.2 T4.3 T5.3 T6.3 T7.3 T8.3 T9.3 Trimmpoti.1 U1.6 U2.6 U4.6 U5.6 U6.6 U7.6 U8.6 U9.6 | length 17.8
  Top Layer w0.254: v1(26.035,61.087) 26.754,61.087 R2.1 ; v1(26.416,57.023) 26.416,56.277 T4.3 ; v1(29.464,54.102) 29.464,54.035 29.657,53.842 U1.6 U1.6@29.667,52.445
  Layer 1 w0.254: v1(37.465,30.48) 38.705,30.48 39.336,29.849 43.946,29.849 v1(45.466,31.369)
  Bottom Layer w0.254: OP1.7 36.068,32.487 36.66,33.079 36.892,33.079 37.465,33.652 v1(37.465,35.052) 37.512,35.005 37.512,34.84 38.635,33.717 R24.2
  other v1: 44.577,30.607 31.369,43.815
10sIntegrator: OP1.2 OP1.6 R30.1 | length 24.3
  Layer 2 w0.254: v1(34.798,32.258) 34.806,32.258 36.072,33.524 36.072,45.216 v1(38.1,47.244)
  Bottom Layer w0.254: OP1.6 34.798,31.637 36.068,30.367 OP1.2 ; v1(38.1,47.244) 38.523,47.244 38.839,47.56 39,47.56 39.6,48.16 R30.1
500msIntegrator: OP2.2 OP2.6 R26.1 | length 27.5
  Layer 1 w0.254: v1(32.131,45.085) 32.131,43.221 31.166,42.256 31.166,39.576 31.881,38.861 31.881,33.778 v1(37.592,28.067)
  Bottom Layer w0.254: OP2.2 30.113,43.815 31.383,45.085 OP2.6 ; v1(37.592,28.067) 38.1,27.559 R26.1
!BSPDaus: Q1.6 Q3.5 | length 10.7
  Top Layer w0.254: Q1.6 40.288,52.013 40.288,51.571 40.658,51.201 42.589,51.201 43.563,52.175 48.973,52.175 49.343,51.805 49.343,51.363 Q3.5
BP>30Bar: Q1.2 R12.2 T7.1 U5.7 | length 30.2
  Top Layer w0.254: v1(39.357,46.905) 39.357,46.972 39.6,47.214 39.6,48.013 Q1.2 ; U5.7 v1(40.071,34.929) ; v1(43.815,53.975) 43.815,53.92 44.771,52.964 T7.1
  Layer 1 w0.254: v1(40.071,34.929) 40.702,35.56 40.702,39.686 39.933,40.455 39.933,46.33 v1(39.357,46.905) 39.357,48.187 39.62,48.449 39.62,50.081 38.862,50.839 38.862,53.721 40.128,54.987 41.936,54.987 42.948,53.975 v1(43.815,53.975)
BPShrtGND: Q2.4 R9.2 T6.1 U4.7 | length 13.5
  Top Layer w0.254: T6.1 39.007,41.529 Q2.4 ; U4.7 R9.2 45.48,34.993 46.736,36.249 v1(46.736,36.703)
  Layer 2 w0.254: v1(40.894,41.529) 43.307,39.116 43.624,39.116 46.037,36.703 v1(46.736,36.703)
BrakeIn: "J4 BrakeIn.1" R11.1 U4.8 | length 34.4
  Top Layer w0.254: U4.8 R11.1
  Layer 1 w0.254: v1(44.069,32.639) 45.212,32.639 47.752,35.179 47.752,51.308 43.307,55.753 43.307,59.817 44.45,60.96
BSPDaus: D1.1 Q3.3 T8.1 | length 12.2
  Top Layer w0.254: 48.731,46.883 48.731,47.325 Q3.3 48.712,43.461 T8.1@48.961,43.212 ; T8.1 49.945,43.5 50.225,43.219 50.225,42.949 50.506,42.669 55.784,42.669 56.007,42.446 D1.1
BSPDpulse: Q2.10 Q3.1 T9.1 | length 17.1
  Top Layer w0.254: v1(45.085,40.259) 46.515,40.259 47.412,41.156 47.412,50.27 47.561,50.419 49.529,50.419 49.993,50.883 49.993,51.874 49.742,52.125 49.742,52.845 v1(49.469,53.118)
BSPDreset: Q1.3 R16.1 R18.1 | length 25.2
  Top Layer w0.254: v1(30.226,39.878) 30.226,38.097 33.271,35.052 v1(34.798,35.052) ; v1(40.259,46.99) 40.264,46.995 40.264,48.027 Q1.3
  Bottom Layer w0.254: v1(30.226,39.878) 30.273,39.831 30.273,39.665 30.849,39.089 R18.1 ; R16.1@34.007,35.464 R16.1 34.23,35.612 34.79,35.052 v1(34.798,35.052) 34.798,35.435 37.749,38.386 37.749,41.4 40.009,43.66 40.009,44.33 40.259,44.58 v1(40.259,46.99)
CLKGateReset: Q2.12 R31.2 U9.7 | length 20.7
  Top Layer w0.254: v1(38.469,54.471) 38.338,54.34 38.338,51.307 38.989,50.656 v1(38.989,49.403) ; v1(42.926,42.799) Q2.12
  Layer 2 w0.254: v1(38.989,49.403) 39.886,50.3 40.512,50.3 41.021,49.791 41.021,45.212 41.148,45.085 41.148,44.58 42.926,42.802 v1(42.926,42.799)
  Bottom Layer w0.254: v1(38.469,54.471) 38.516,54.518 38.516,54.704 38.989,55.177 U9.7
CLKGateSet: Q2.11 R27.2 U3-Inverter.B1 U8.7 | length 34
  Top Layer w0.254: U3-Inverter.B1 41.021,53.908 41.402,54.289 v1(41.402,54.356) ; v1(41.656,26.162) 41.703,26.209 42.001,26.209 43.434,27.642 v1(43.434,30.48) ; v1(44.323,40.259) 44.323,40.389 45.463,41.529 Q2.11
  Layer 1 w0.254: v1(41.402,54.356) 44.323,51.435 v1(44.323,40.259) 44.323,35.557 43.434,34.668 v1(43.434,30.48)
GND: "J2 GND.1" BP>30B.1 BPShrtGND.1 BSPDCLK.1 BSPDState.1 OP1.4 OP2.4 pad.3 pad.4 Q1.4 Q2.5 Q2.8 Q2.13 Q3.4 R1.2@28.377,45.831 R3.1 R7.2 R10.1 R15.1 R19.2 R22.2 R25.1 R29.1 T1.2 TPS>25%.1 TPSShrtGND.1 U1.2 U2.2 U4.2 U5.2 U6.1 U6.2 U7.1 U7.2 U8.2 U9.2 | length 73.9
  Top Layer w0.254: v1(28.377,45.831) 28.382,45.836 28.382,47.63 U1.2 ; TPSShrtGND.1 32.158,58.801 v1(32.893,58.801) ; 34.925,61.214 35.183,60.956 ; v1(35.052,53.213) 35.099,53.166 35.339,53.166 35.499,53.006 U2.2 ; BPShrtGND.1 36.957,44.417 37.796,45.256 37.796,45.488 v1(38.119,45.811) ; v1(39.751,30.607) 39.751,30.54 40.071,30.22 U5.2 ; Q1.4@40.9,48.013 Q1.4 40.919,47.219 v1(41.783,46.355) 41.85,46.355 41.996,46.209 43.796,46.209 TPS>25%.1 44.85,46.717 44.85,44.884 45.665,44.069 Q2.13 ; R7.2 45.401,25.908 v1(45.466,25.908) ; U4.2 U4.2@45.405,29.382 ; v1(46.09,37.719) 47.333,37.719 BSPDState.1 48.603,38.138 v1(49.784,36.957) ; BP>30B.1@46.736,54.991 46.99,54.737 v1(46.99,54.61) ; Q3.4@49.383,47.365 Q3.4 49.362,48.981 v1(50.038,49.657) ; T1.2 54.812,46.904 54.864,46.956 v1(54.864,47.1)
  Layer 1 w0.254: v1(41.021,40.259) 43.053,38.227 v1(43.053,36.068) ; 54.737,41.529 54.737,42.669 55.307,43.238 55.307,46.657 v1(54.864,47.1)
  Layer 2 w0.254: v1(27.305,36.068) 28.695,34.678 30.385,34.678 33.436,31.627 38.062,31.627 39.705,33.27 49.026,33.27 v1(49.53,32.766)
  Bottom Layer w0.254: v1(43.053,36.068) 43.1,36.021 43.1,35.691 43.367,35.425 U8.2 ; v1(52.385,52.124) 53.344,51.165 53.575,51.165 53.714,51.304 54.236,51.304 54.606,50.934 54.606,49.641 54.41,49.444 54.41,47.764 54.864,47.31 v1(54.864,47.1)
  other v1: 45.339,28.067 36.703,33.782
NetBP>30B_2: BP>30B.2 R35.2 | length 1.1
  Top Layer w0.254: R35.2 46.775,53.352 BP>30B.2
NetBPShrtGND_2: BPShrtGND.2 R34.1 | length 1.9
  Top Layer w0.254: R34.1 38.557,42.696 38.481,42.772 v1(38.481,44.323)
NetBSPDCLK_2: BSPDCLK.2 R37.1 | length 1.2
  Top Layer w0.254: v1(51.308,50.566) 52.129,50.566 52.236,50.673 BSPDCLK.2
NetBSPDState_2: BSPDState.2 R36.2 | length 2
  Top Layer w0.254: R36.2 50.177,39.015 BSPDState.2
NetC1_1: C1.1 R17.2 T2.2 U6.7 | length 25.5
  Top Layer w0.254: v1(32.512,38.862) 37.167,38.862 37.415,38.614 38.729,38.614 v1(39.243,38.1)
  Bottom Layer w0.254: T2.2 32.278,37.846 R17.2 v1(32.512,38.862) ; C1.1@51.535,38.35 52.358,37.527 C1.1
  Bottom Layer w0.4: v1(39.243,38.1) 44.45,38.1 44.831,38.481 50.485,38.481 C1.1
NetC1_2: C1.2 OP1.3 R16.2 R17.1 U6.8 | length 37.3
  Top Layer w0.254: v1(32.512,36.703) 39.049,36.703 39.176,36.83 v1(39.243,36.83)
  Layer 1 w0.254: v1@51.75,26.543 51.876,26.416 v1(51.943,26.416)
  Layer 1 w0.4: v1(34.798,26.289) 38.139,26.289 40.699,28.849 51.328,28.849 v1(51.943,29.464)
  Bottom Layer w0.254: R17.1 32.587,36.83 32.86,36.557 32.86,35.907 R16.2 33.08,33.002 32.847,32.769 32.847,30.925 34.798,28.974 OP1.3 v1(34.798,26.289) OP1.3@34.798,26.187
  other v1: 34.798,27.051 51.943,27.305 51.943,28.321
NetC2_1: C2.1 OP2.3 R20.2 R23.1 U7.8 | length 22.3
  Layer 1 w0.254: v1(25.908,45.085) 25.908,45.844 32.766,52.702 32.766,53.848 v1(31.75,54.864)
  Bottom Layer w0.254: U7.8@31.18,56.323 31.18,58.652 31.232,58.704 R23.1 ; v1(31.75,54.864) 31.369,55.245 32.381,54.233 32.774,54.233 33.147,53.86 33.147,53.823 33.52,53.45 33.609,53.45 34.627,52.432 34.627,50.963 34.85,50.74 R20.2
NetC2_2: C2.2 R23.2 T3.2 U7.7 | length 13.6
  Top Layer w0.254: v2(32.004,48.641) 32.004,50.606 32.129,50.732 v2(32.129,50.798)
  Bottom Layer w0.254: R23.2 29.982,56.271 29.845,56.134 29.845,55.586 32.489,52.942 32.578,52.942 33.147,52.373 C2.2 33.147,52.323 32.178,51.354 32.178,50.847 v2(32.129,50.798) ; T3.2 31.675,48.903 31.937,48.641 v2(32.004,48.641)
NetD1_2: D1.2 R13.1 | length 4.1
  Top Layer w0.254: R13.1 54.774,45.575 55.022,45.327 55.784,45.327 56.007,45.104 D1.2
NetQ1_5: Q1.5 U3-Inverter.C2 | length 1.2
  Top Layer w0.254: U3-Inverter.C2 40.9,52.711 40.9,52.051 Q1.5
NetR1_1: R1.1@44.133,56.299 R14.2 | length 12.1
  Top Layer w0.254: v1(44.069,57.15) 44.7,56.519 46.616,56.519 46.739,56.642 50.284,56.642 52.177,54.749 52.177,54.346 53.85,52.673 v1(53.975,52.673)
NetR1_1: R1.1@27.127,45.831 R2.2 R6.1 U1.1 | length 17.9
  Top Layer w0.254: U1.1@27.122,47.63 27.122,45.836 R1.1@27.127,45.831 ; R6.1 27.947,59.182 v1(28.575,59.182) ; R6.1@28.047,59.282 R2.2
  Layer 1 w0.254: v1(26.924,47.752) 30.353,51.181 30.353,54.991 28.575,56.769 v1(28.575,59.182)
NetR1_2: R1.2@46.413,56.299 R15.2 | length 15
  Top Layer w0.254: v1(46.355,57.15) 51.816,57.15 55.372,53.594 55.372,50.419 55.372,49.514 R15.2
NetR3_2: R3.2 Trimmpoti.2 U2.8 | length 19.1
  Top Layer w0.254: Trimmpoti.2 29.53,40.439 31.99,42.899 34.72,42.899 36.805,44.983 36.805,45.775 R3.2 U2.8@36.769,47.531 ; U2.8 U2.8@36.769,47.531 ; v1(37.211,47.371) 36.929,47.371 U2.8@36.769,47.531
NetR4_2: R4.2 R5.1 U2.1 | length 10.6
  Top Layer w0.254: v1(36.322,53.086) 36.609,53.086 U2.1@36.769,52.926 ; R4.2 36.769,54.326 U2.1@36.769,52.926 ; U2.1 U2.1@36.769,52.926
  Layer 1 w0.254: v1(34.29,45.72) 34.29,50.546 36.322,52.578 v1(36.322,53.086)
NetR7_1: R7.1 R8.2 R9.1 U4.1 | length 14.3
  Top Layer w0.254: U4.1 R8.2 44.14,27.03 45.273,27.03 R7.1 46.388,27.035 46.521,26.903 v1(46.588,26.903)
  Bottom Layer w0.254: v1(45.405,36.443) 45.452,36.396 45.805,36.396 46.588,35.613 v1(46.588,26.903)
NetR10_2: "Trimmpoti 2.2" R10.2 U5.8 | length 5
  Top Layer w0.254: 34.737,33.647 34.741,33.647 35.468,32.92 37.22,32.92 37.639,33.339 37.639,33.503 R10.2 37.912,33.701 38.185,33.428 38.755,33.428 U5.8
NetR11_2: R11.2 R12.1 U5.1 | length 13.4
  Top Layer w0.254: v1(40.071,36.179) 42.272,36.179 42.792,36.699 43.314,36.699 43.684,36.329 43.684,36.179 43.871,36.179 R11.2
  Bottom Layer w0.254: v1(38.735,29.21) 39.803,29.21 40.702,30.109 40.702,35.548 v1(40.071,36.179)
NetR13_2: R13.2 T1.1 | length 3.1
  Top Layer w0.254: T1.1 51.424,45.415 52.191,44.648 52.355,44.648 R13.2
NetR14_1: R14.1 T1.3 | length 3.8
  Top Layer w0.254: v1(51.308,49.657) 51.671,49.657 ; T1.3 52.374,48.954 51.671,49.657 ; R14.1@53.594,50.417 53.166,49.989 53.166,49.966 52.857,49.657 51.671,49.657 ; R14.1@54.195,50.276 R14.1@54.372,50.276
NetR18_2: R18.2 T2.1 | length 1.5
  Bottom Layer w0.254: R18.2 29.349,38.889 30.063,38.175 30.063,37.897 T2.1
NetR19_1: R19.1 T2.3 | length 1.9
  Bottom Layer w0.254: T2.3 30.614,36.54 30.665,36.489 31.071,36.489 31.877,35.683 R19.1
NetR21_2: R21.2 T3.1 | length 0.9
  Bottom Layer w0.254: T3.1 31.274,49.903 R21.2
NetR22_1: R22.1 T3.3 | length 1.2
  Bottom Layer w0.254: R22.1 28.13,49.403 T3.3
NetR24_1: R24.1 R25.2 U8.8 | length 7.5
  Top Layer w0.254: v1(39.497,32.004) 41.021,30.48 v1(42.164,30.48)
  Layer 1 w0.254: v1(38.735,35.117) 39.497,34.355 v1(39.497,32.004)
  Bottom Layer w0.254: U8.8 U8.8@42.097,30.531
NetR26_2: R26.2 R27.1 U8.1 | length 13.2
  Top Layer w0.254: v1(38.989,25.908) 39.243,26.162 v1(40.513,26.162)
  Bottom Layer w0.254: v1(38.989,25.908) 38.989,26.186 41.416,28.613 41.416,30.813 42.097,31.494 U8.1 42.097,35.226 41.937,35.386 41.449,35.386 v1(41.402,35.433) ; R27.1@40.513,26.059 R27.1
NetR28_1: R28.1 R29.2 U9.8 | length 13.7
  Layer 2 w0.254: v1(41.91,47.244) 41.91,51.562 v1(42.545,52.197)
  Bottom Layer w0.254: v1(41.021,56.261) 40.419,56.261 40.259,56.101 U9.8 40.259,53.975 41.005,53.229 41.91,53.229 42.5,52.639 42.5,52.242 v1(42.545,52.197) 42.545,51.359 41.629,50.443 R29.2
NetR30_2: R30.2 R31.1 U9.1 | length 8.5
  Layer 2 w0.254: v1(37.211,49.757) 37.735,49.757 38.72,48.772 39.501,48.772 40.005,49.276 40.005,49.356 40.251,49.602 v1(40.251,49.669)
  Bottom Layer w0.254: R31.1 38.079,49.413 37.582,49.413 37.238,49.757 v1(37.211,49.757) 37.211,49.69 37.084,49.563 37.084,49.229 37.68,48.633 37.827,48.633 38.1,48.36 R30.2 ; v1(40.251,49.669) 40.255,49.673 40.255,51.19 U9.1
NetR32_1: R32.1 TPSShrtGND.2 | length 1.8
  Top Layer w0.254: R32.1 31.935,57.424 TPSShrtGND.2
NetR32_2: R32.2 T4.2 | length 2.5
  Top Layer w0.254: T4.2 28.482,57.211 29.672,58.401 30.005,58.401 30.282,58.678 R32.2@30.282,58.745
NetR33_1: R33.1 T5.2 | length 1.9
  Top Layer w0.254: R33.1 44.704,48.977 T5.2 44.958,49.231 v1(44.958,49.784)
NetR33_2: R33.2 TPS>25%.2 | length 1.1
  Top Layer w0.254: TPS>25%.2 42.977,47.779 R33.2
NetR34_2: R34.2 T6.2 | length 1.1
  Top Layer w0.254: T6.2 37.104,41.526 R34.2
NetR35_1: R35.1 T7.2 | length 1
  Top Layer w0.254: T7.2 44.833,54.852 R35.1
NetR36_1: R36.1 T8.2 | length 9.9
  Top Layer w0.254: T8.2 v1(54.676,43.5) v1@54.737,43.561 ; R36.1 51.677,40.868 52.54,40.005 v1(52.578,40.005)
  Bottom Layer w0.254: v1(52.578,40.005) 53.438,40.005 54.676,41.243 v1(54.676,43.5)
NetR37_2: R37.2 T9.2 | length 1.3
  Top Layer w0.254: v1(51.308,51.816) 51.308,53.057 T9.2
  other v1: 51.339,53.088
SDBSPDin: J5SDin.1 R1.3 | length 16.7
  Bottom Layer w1: J5SDin.1@47.498,60.833 47.613,60.718 47.613,60.294 47.752,60.155 47.752,55.395 48.121,55.026 48.121,54.194 47.752,53.825 47.752,45.89 R1.3
SDBSPDout: "J6 SDout.1" R1.4 R1.5 | length 6.7
  Bottom Layer w0.254: 52.113,60.876 52.197,60.96
  Bottom Layer w1: R1.4 52.113,56.299 ; 52.113,60.622 52.113,56.299 ; R1.5 52.113,56.299
Sensorfoult: Q2.9 Q3.2 R20.1 R21.1 | length 32.5
  Top Layer w0.254: v1(44.954,39.185) 45.021,39.185 45.15,39.055 46.449,39.055 46.515,38.989 48.062,40.536 Q3.2 48.062,49.122 48.683,49.742 v1(48.756,49.742)
  Layer 2 w0.254: v1(35.814,49.657) 35.814,49.787 39.494,53.467 42.672,53.467 46.397,49.742 v1(48.756,49.742)
  Bottom Layer w0.254: R21.1 33.087,49.59 R20.1 34.959,49.623 35.78,49.623 v1(35.814,49.657)
ShrtGNDdetection: Q2.1 Q2.6 | length 7.8
  Top Layer w0.254: Q2.6 41.065,38.989 41.746,39.67 41.746,44.658 41.065,45.339 Q2.1
TPS>25%: Q1.1 R5.2 T5.1 U2.7 | length 12.6
  Top Layer w0.254: R5.2 35.499,45.968 35.499,48.445 36.18,49.126 37.051,49.126 37.45,48.727 37.45,48.402 37.82,48.032 Q1.1 38.988,48.051 38.988,48.493 39.533,49.038 40.512,49.038 41.258,49.784 v1(42.799,49.784) 42.799,49.104 T5.1
TPSBPfoult: Q1.7 Q2.2 | length 11.8
  Top Layer w0.254: Q1.7 39.638,52.051 39.638,52.652 39.751,52.765 v1(39.751,52.832)
  Layer 1 w0.254: v1(39.751,52.832) 39.751,51.061 42.799,48.013 42.799,46.228 v1(40.64,44.069)
TPSin: "J3 TPSin.1" R4.1 U1.8 | length 21.9
  Top Layer w0.254: U1.8 27.117,51.635 27.798,50.954 31.209,50.954 32.004,51.749 32.004,53.253 32.728,53.977 34.972,53.977 35.245,54.25 R4.1 35.245,56.962 36.642,58.359 38.674,58.359 41.275,60.96
TPSShrtGND: Q2.3 R6.2 T4.1 U1.7 | length 26.3
  Top Layer w0.254: R6.2@26.461,59.204 R6.2 26.49,59.1 27.319,58.272 27.319,56.936 27.824,56.43 28.049,56.43 28.387,56.092 U1.7
  Layer 2 w0.254: v1(28.448,53.848) 28.826,53.848 29.203,53.471 30.349,53.471 35.814,48.006 38.23,48.006 38.731,47.505 38.731,46.983 38.726,46.978 38.726,46.276 38.75,46.252 38.75,45.067 41.018,42.799 v1(41.021,42.799)
pads on no net: "Trimmpoti 2.3" OP1.1 OP1.5 OP1.8 OP2.1 OP2.5 OP2.8 Q2.7 Q2.14 Trimmpoti.3 U1.3 U1.4 U1.5 U2.3 U2.4 U2.5 U3-Inverter.A1 U3-Inverter.A2 U3-Inverter.C1 U4.3 U4.4 U4.5 U5.3 U5.4 U5.5 U6.3 U6.4 U6.5 U7.3 U7.4 U7.5 U8.3 U8.4 U8.5 U9.3 U9.4 U9.5
copper on no net: | length 148.8
  Top Layer w0.254: 25.273,25.146 25.273,64.262 60.579,64.262 60.579,25.146 25.273,25.146
  other v3: 25.908,50.165

## Polygon pours and split planes (outlines as drawn)
GND on Bottom Layer "Top Layer-No Net 2" (solid, remove dead copper, pour order 2): 25.4,25.4 25.527,25.273 60.325,25.273 60.325,64.262 25.4,64.262
5V on Top Layer "Top Layer-No Net" (solid, remove dead copper, pour order 6): 25.431,25.4 60.325,25.4 60.325,64.262 25.431,64.262
GND on Layer 2 "GND_L03_P007" (solid, pour order 7): 25.4,64.262 60.325,64.262 60.325,25.4 25.4,25.273
5V on Layer 1 "5V_L02_P008" (solid, pour order 8): 25.348,64.262 60.273,64.262 60.273,25.273 25.348,25.273

## Silkscreen, mask and mechanical layers (free items; w line width, h text height)
Board Outline:
  the board outline again, w0.254